# EAGLE board rc13-mbed-main-board (EAGLE 6.5.0)
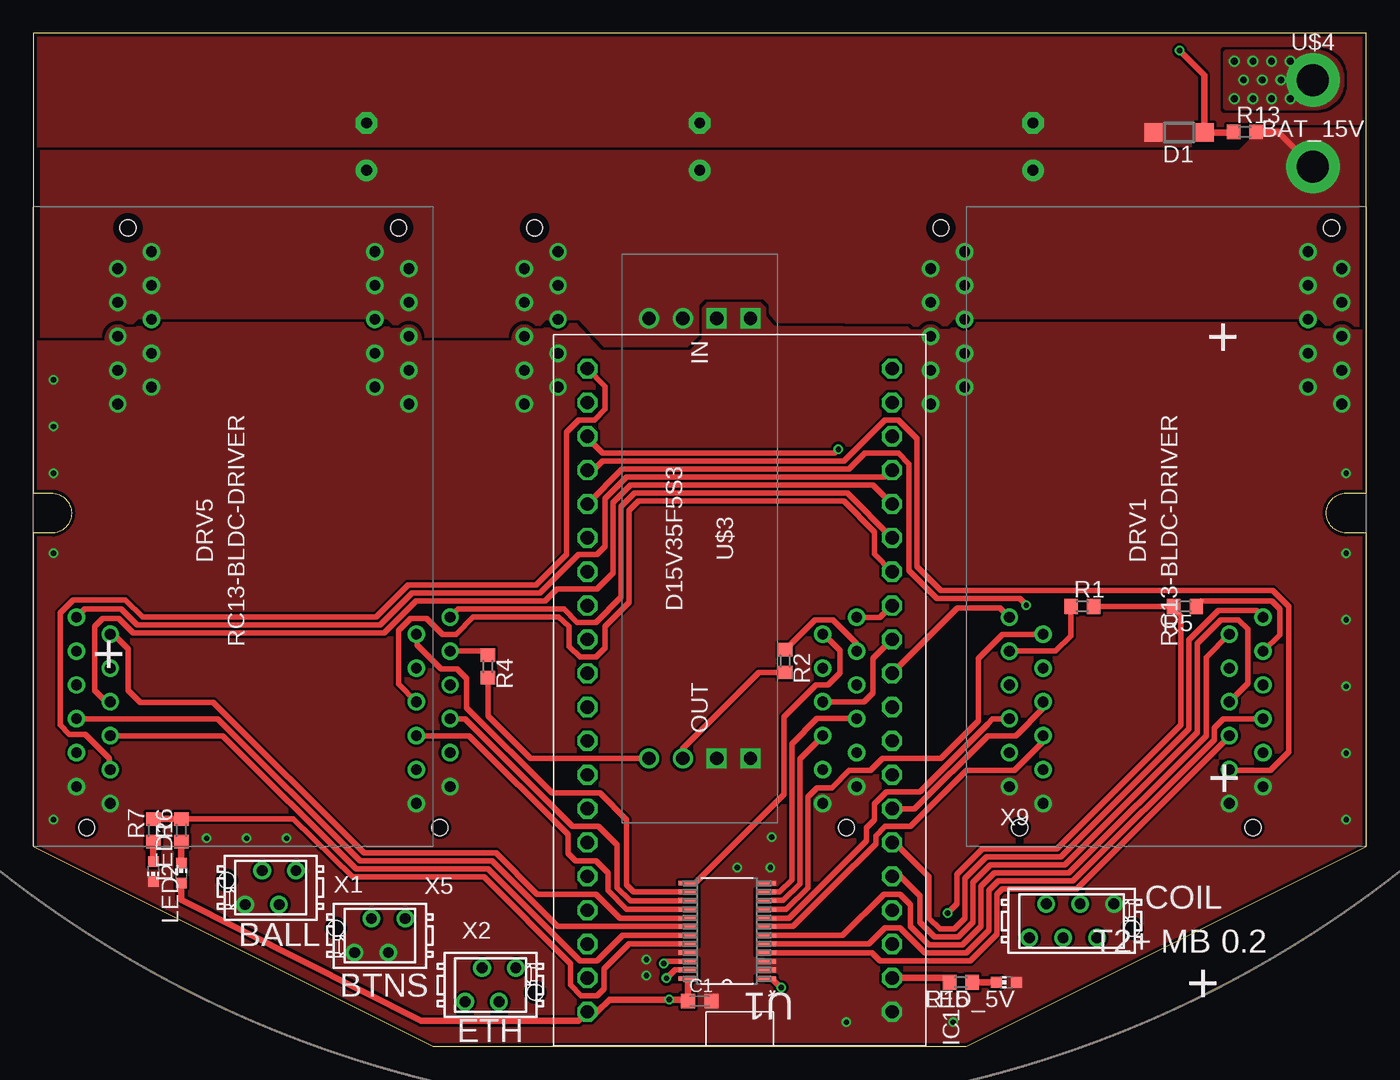
[diagram p0: board, top side]
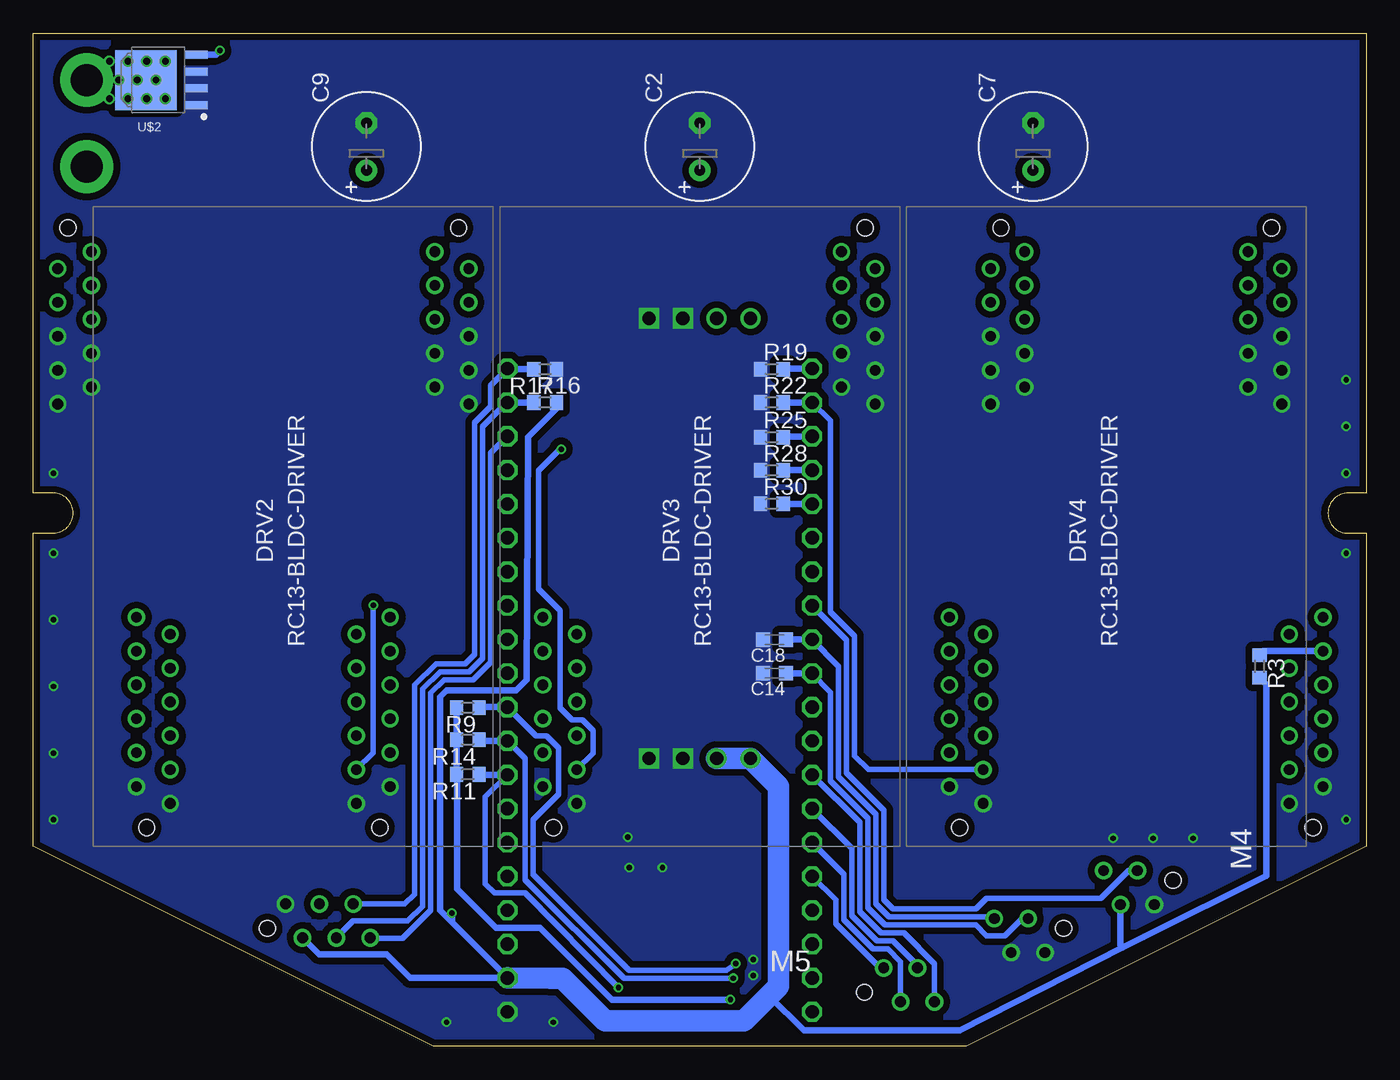
[diagram p1: board, bottom side, seen from below]

Size 100 x 76 mm. Coordinates in mm from the lower left corner, seen from the top.
Outline: 0,15 30,0 70,0 100,15 100,38.5 98.5,38.5 arc-180 98.5,41.5 100,41.5 100,76 0,76 0,41.5 1.5,41.5 arc-169 1.5,38.5 0,38.5 0,15
Copper layers (1*16): Top 0.035mm / dielectric 1.5mm / Bottom 0.035mm
Design rules "Fusion_eagle_rule_v1.1 *": minimum track width 6mil, minimum drill 12mil, track to track 0.2mm, track to pad 0.2mm, pad to pad 0.2mm, via to via 0.2mm, smd to smd 0mil, copper to edge 10mil, drill to drill 10mil, minimum pad ring 10mil, minimum via ring 6mil, stop-mask expansion 2mil, vias tented up to drill 100mil, thermal gap 10mil
Holes 1.2 mm at 82.45,8.85 37.65,4.05 22.7,8.85 14.5,12.45

## Footprints (pad centres in the part's own frame; a part is rotated, then mirrored left to right if it is on the bottom)
PWR_HOLE = drill 2.4 pad 4: P$1 0,0
C0603K = smd 1.05 x 1.08: 1 -0.875,0; 2 0.875,0
E3,5-8 = drill 0.813 pad 1.6: + -1.778,0 | drill 0.813 pad 1.6 octagon: - 1.778,0
SOD123 = smd 1.4 x 1.4: A 1.9,0; C -1.9,0
RC13-BLDC-DRIVER = drill 0.8 pad 1.3: LOGIC1 3.215,24.23; LOGIC2 4.485,26.77; LOGIC3 5.755,24.23; LOGIC4 7.025,26.77; LOGIC5 8.295,24.23; LOGIC6 9.565,26.77; LOGIC7 10.835,24.23; LOGIC8 12.105,26.77; LOGIC9 13.375,24.23; LOGIC10 14.645,26.77; LOGIC11 15.915,24.23; LOGIC12 17.185,26.77; PWR1 44.615,4.37; PWR2 43.345,1.83; PWR3 42.075,4.37; PWR4 40.805,1.83; PWR5 39.535,4.37; PWR6 38.265,1.83; PWR7 36.995,4.37; PWR8 35.725,1.83; PWR9 34.455,4.37; PWR10 33.185,1.83 | hole 1.2: 1.4,26; 46.4,2.6
DIL40_0.9 = drill 1 pad 1.397 octagon: 1 -22.86,-11.43; 2 -20.32,-11.43; 3 -17.78,-11.43; 4 -15.24,-11.43; 5 -12.7,-11.43; 6 -10.16,-11.43; 7 -7.62,-11.43; 8 -5.08,-11.43; 9 -2.54,-11.43; 10 0,-11.43; 11 2.54,-11.43; 12 5.08,-11.43; 13 7.62,-11.43; 14 10.16,-11.43; 15 12.7,-11.43; 16 15.24,-11.43; 17 17.78,-11.43; 18 20.32,-11.43; 19 22.86,-11.43; 20 25.4,-11.43; 21 25.4,11.43; 22 22.86,11.43; 23 20.32,11.43; 24 17.78,11.43; 25 15.24,11.43; 26 12.7,11.43; 27 10.16,11.43; 28 7.62,11.43; 29 5.08,11.43; 30 2.54,11.43; 31 0,11.43; 32 -2.54,11.43; 33 -5.08,11.43; 34 -7.62,11.43; 35 -10.16,11.43; 36 -12.7,11.43; 37 -15.24,11.43; 38 -17.78,11.43; 39 -20.32,11.43; 40 -22.86,11.43
CHIP-LED0603 = smd 0.8 x 0.8: A 0,-0.75; C 0,0.75
R0603 = smd 1 x 1.1: 1 -0.85,0; 2 0.85,0
SOP65P640X110-24N = smd 1.473 x 0.356: 1 -2.921,3.581; 2 -2.921,2.921; 3 -2.921,2.286; 4 -2.921,1.626; 5 -2.921,0.965; 6 -2.921,0.33; 7 -2.921,-0.33; 8 -2.921,-0.965; 9 -2.921,-1.626; 10 -2.921,-2.286; 11 -2.921,-2.921; 12 -2.921,-3.581; 13 2.921,-3.581; 14 2.921,-2.921; 15 2.921,-2.286; 16 2.921,-1.626; 17 2.921,-0.965; 18 2.921,-0.33; 19 2.921,0.33; 20 2.921,0.965; 21 2.921,1.626; 22 2.921,2.286; 23 2.921,2.921; 24 2.921,3.581
TO127P600X120-5N = smd 1.65 x 0.6: 1 -2.65,1.905; 2 -2.65,0.635; 3 -2.65,-0.635; 4 -2.65,-1.905 | smd 4.6 x 4.5: 5 1.15,0
D15V35F5S3 = drill 1: EN -16.51,-3.81; P$5 -16.51,-1.27; P$7 16.51,-1.27; P$8 16.51,-3.81 | drill 1 square: P$1 -16.51,3.81; P$2 -16.51,1.27; P$3 16.51,3.81; P$4 16.51,1.27
MICROMATCH-4 = drill 0.813: 1 1.905,1.27; 2 0.635,-1.27; 3 -0.635,1.27; 4 -1.905,-1.27
MICROMATCH-6 = drill 0.813: 1 3.175,1.27; 2 1.905,-1.27; 3 0.635,1.27; 4 -0.635,-1.27; 5 -1.905,1.27; 6 -3.175,-1.27

## Placement (x,y rotation side)
BAT_15V  M01_PWR  [PWR_HOLE]  96,66 0 top
C1  100nF  [C0603K]  50,3.4 0 top
C2  470uF  [E3,5-8]  50,67.5 90 bottom
C7  470uF  [E3,5-8]  25,67.5 90 bottom
C9  470uF  [E3,5-8]  75,67.5 90 bottom
C14  100nF  [C0603K]  44.4,28 180 bottom
C18  100nF  [C0603K]  44.4,30.5 180 bottom
D1  12V  [SOD123]  85.95,68.56 180 top
DRV1  RC13-BLDC-DRIVER  [RC13-BLDC-DRIVER]  100,15 90 top
DRV2  RC13-BLDC-DRIVER  [RC13-BLDC-DRIVER]  65.5,15 90 bottom
DRV3  RC13-BLDC-DRIVER  [RC13-BLDC-DRIVER]  35,15 90 bottom
DRV4  RC13-BLDC-DRIVER  [RC13-BLDC-DRIVER]  4.5,15 90 bottom
DRV5  RC13-BLDC-DRIVER  [RC13-BLDC-DRIVER]  30,15 90 top
IC1  MBED_MICROCONTROLLER  [DIL40_0.9]  53,25.44 90 top
LED1  [CHIP-LED0603]  11.1,13 0 top
LED2  [CHIP-LED0603]  9,13.1 180 top
LED_5V  [CHIP-LED0603]  73,4.8 90 top
R1  10k  [R0603]  78.7,33 0 top
R2  10k  [R0603]  56.4,28.9 270 top
R3  10k  [R0603]  8,28.5 270 bottom
R4  10k  [R0603]  34.1,28.5 270 top
R5  10k  [R0603]  86.4,33 180 top
R6  2K2  [R0603]  11.1,16.2 90 top
R7  2K2  [R0603]  9,16.2 90 top
R9  2K2  [R0603]  67.4,25.4 180 bottom
R11  2K2  [R0603]  67.4,20.4 180 bottom
R13  100k  [R0603]  90.89,68.59 0 top
R14  2K2  [R0603]  67.4,23 180 bottom
R15  2K2  [R0603]  69.6,4.8 180 top
R16  10k  [R0603]  61.6,48.3 0 bottom
R17  10k  [R0603]  61.6,50.8 180 bottom
R19  10k  [R0603]  44.6,50.8 0 bottom
R22  10k  [R0603]  44.6,48.3 0 bottom
R25  10k  [R0603]  44.6,45.7 0 bottom
R28  10k  [R0603]  44.6,43.2 0 bottom
R30  10k  [R0603]  44.6,40.7 0 bottom
U1  PCA9555PW,118  [SOP65P640X110-24N]  52.05,8.65 180 top
U$2  MOSFET-N  [TO127P600X120-5N]  90.4,72.5 180 bottom
U$3  D15V35F5S3  [D15V35F5S3]  50,38.1 270 top
U$4  M01_PWR  [PWR_HOLE]  96,72.5 0 top
X1  BALL_SENS  [MICROMATCH-4]  17.8,11.9 180 top
X2  ETH  [MICROMATCH-4]  34.3,4.6 0 top
X5  BTNS  [MICROMATCH-4]  26,8.3 180 top
X9  COIL  [MICROMATCH-6]  77.9,9.4 0 top

## Library data of the parts
BAT_15V U$4 = tellis2
C1 C2 C7 C9 C14 C18 R1-R7 R9 R11 R13-R17 R19 R22 R25 R28 R30 = rcl
D1 = diode
DRV1-DRV5 = rc13-bldc-driver
IC1 = mbed-microcontroller
LED1 LED2 LED_5V = led
U1 = PCA9555; MPN: PCA9555PW,118; OC_FARNELL: 2101299; OC_NEWARK: 70R6680; PACKAGE: 24TSSOP; SUPPLIER: NXP
U$2 = nxp_sot669
U$3 = D15V35F5S3
X1 X2 X5 = con-amp-micromatch; MPN: 7-215464-4; OC_FARNELL: 3784629; OC_NEWARK: 19R8124
X9 = con-amp-micromatch; MPN: 7-215464-6; OC_FARNELL: 3784630; OC_NEWARK: 19R8125

## Nets
+3V3: C1.1 IC1.40 LED1.A R9.2 R11.2 R14.2 U1.24
+5V: IC1.2 R1.2 R2.2 R3.2 R4.2 R5.2 R15.2 R16.2 U$3.P$7 U$3.P$8 X1.3 X9.2
+15V: BAT_15V.P$1 C2.+ C7.+ C9.+ DRV1.PWR1 DRV1.PWR2 DRV1.PWR3 DRV1.PWR4 DRV1.PWR5 DRV2.PWR1 DRV2.PWR2 DRV2.PWR3 DRV2.PWR4 DRV2.PWR5 DRV3.PWR1 DRV3.PWR2 DRV3.PWR3 DRV3.PWR4 DRV3.PWR5 DRV4.PWR1 DRV4.PWR2 DRV4.PWR3 DRV4.PWR4 DRV4.PWR5 DRV5.PWR1 DRV5.PWR2 DRV5.PWR3 DRV5.PWR4 DRV5.PWR5 R13.2 U$3.EN U$3.P$5
BALL: IC1.28 X1.2
BAT_GND: U$2.5 U$4.P$1
BRAKE1: DRV1.LOGIC6 U1.8
BRAKE2: DRV2.LOGIC6 U1.5
BRAKE3: DRV3.LOGIC6 U1.11
BRAKE4: DRV4.LOGIC6 U1.15
BRAKE5: DRV5.LOGIC6 U1.18
BTN1: C14.1 IC1.30 X5.2
BTN2: C18.1 IC1.29 X5.4
CHARGE: IC1.20 R17.2 X9.5
COAST1: DRV1.LOGIC11 U1.9
COAST2: DRV2.LOGIC11 U1.6
COAST3: DRV3.LOGIC11 U1.13
COAST4: DRV4.LOGIC11 U1.14
COAST5: DRV5.LOGIC11 U1.17
DIR1: DRV1.LOGIC5 U1.7
DIR2: DRV2.LOGIC5 U1.4
DIR3: DRV3.LOGIC5 U1.10
DIR4: DRV4.LOGIC5 U1.16
DIR5: DRV5.LOGIC5 U1.19
DIRO1: DRV1.LOGIC12 IC1.11
DIRO2: DRV2.LOGIC12 IC1.6
DIRO3: DRV3.LOGIC12 IC1.13
DIRO4: DRV4.LOGIC12 IC1.15
DIRO5: DRV5.LOGIC12 IC1.17
DONE: IC1.18 X9.6
GND: C1.2 C2.- C7.- C9.- C14.2 C18.2 D1.A DRV1.LOGIC1 DRV1.LOGIC2 DRV1.PWR6 DRV1.PWR7 DRV1.PWR8 DRV1.PWR9 DRV1.PWR10 DRV2.LOGIC1 DRV2.LOGIC2 DRV2.PWR6 DRV2.PWR7 DRV2.PWR8 DRV2.PWR9 DRV2.PWR10 DRV3.LOGIC1 DRV3.LOGIC2 DRV3.PWR6 DRV3.PWR7 DRV3.PWR8 DRV3.PWR9 DRV3.PWR10 DRV4.LOGIC1 DRV4.LOGIC2 DRV4.PWR6 DRV4.PWR7 DRV4.PWR8 DRV4.PWR9 DRV4.PWR10 DRV5.LOGIC1 DRV5.LOGIC2 DRV5.PWR6 DRV5.PWR7 DRV5.PWR8 DRV5.PWR9 DRV5.PWR10 IC1.1 LED2.C LED_5V.A R17.1 R19.1 R22.1 R25.1 R28.1 R30.1 U1.2 U1.3 U1.12 U1.21 U$2.1 U$2.2 U$2.3 U$3.P$1 U$3.P$2 U$3.P$3 U$3.P$4 X1.1 X5.1 X5.3 X9.1
INT: IC1.8 R11.1 U1.1
KICK: IC1.19 R16.1 X9.4
LED1: R6.2 R7.2 U1.20
N$2: DRV1.LOGIC10 R1.1
N$3: DRV2.LOGIC10 R5.1
N$4: DRV4.LOGIC10 R4.1
N$5: DRV5.LOGIC10 R3.1
N$6: DRV3.LOGIC10 R2.1
N$7: LED1.C R6.1
N$8: LED2.A R7.1
N$9: LED_5V.C R15.1
N$20: D1.C R13.1 U$2.4
PWM1: DRV1.LOGIC3 IC1.25 R30.2
PWM2: DRV2.LOGIC3 IC1.24 R28.2
PWM3: DRV3.LOGIC3 IC1.23 R25.2
PWM4: DRV4.LOGIC3 IC1.22 R22.2
PWM5: DRV5.LOGIC3 IC1.21 R19.2
RD+: IC1.35 X2.2
RD-: IC1.36 X2.1
SCL: IC1.10 R9.1 U1.22
SDA: IC1.9 R14.1 U1.23
TACHO1: DRV1.LOGIC7 IC1.7
TACHO2: DRV2.LOGIC7 IC1.5
TACHO3: DRV3.LOGIC7 IC1.12
TACHO4: DRV4.LOGIC7 IC1.14
TACHO5: DRV5.LOGIC7 IC1.16
TD+: IC1.33 X2.4
TD-: IC1.34 X2.3

## Tracks (layer width: path | path; a pad name or v marks a point on that pad's centre or on a via)
+3V3  (via drill 0.4)
  Top 0.4: C1.1 | 11.1,11.7 LED1.A
  Top 0.5: C1.1 U1.24 | C1.1 49.02,3.5 v47.7,3.5 43.22,3.5 42.3,2.58 IC1.40 41.54,2.54 40.9,1.9 29.1,1.9 11.1,11 11.1,11.7
  Bottom 0.5: R9.2 R14.2 R11.2 68.2,20.35 68.2,11.8 65.3,8.9 62,8.9 56.6,3.5 v47.7,3.5
+5V  (via drill 0.4)
  Top 0.4: R1.2 R5.2 85.55,32.85 86.1,32.3 86.1,24.1 76.8,14.8 71.2,14.8 69.3,12.9 69.3,10.7 v68.6,10 | R2.2 54.45,28.05 48.7,22.3 48.7,21.62 U$3.P$7 | R4.2 34.1,24.8 37.3,21.6 U$3.P$8
  Top 0.5: R15.2 68.23,5.12 IC1.2
  Bottom 0.5: 61.2,5.2 IC1.2 | R16.2 60.75,47.85 62.9,45.7 63,27.5 63.8,26.7 69,26.7 69.5,26.2 69.5,10.2 68.6,9.3 | IC1.2 68.6,9.3 | 18.25,7.41 16.7,8.2 7.5,12.8 7.5,27.15 R3.2 | 18.25,7.41 30.5,1.2 42.2,1.2 44.8,3.8 | v68.6,10 68.6,9.3 | X9.2 78.58,6.9 73.5,6.9 71.72,5.12 IC1.2 | X1.3 18.43,7.59 18.25,7.41
  Bottom 1.6: U$3.P$7 U$3.P$8 44.09,19.49 44.09,4.51 44.8,3.8 46.7,1.9 57.1,1.9 60.3,5.1 61.18,5.1 IC1.2
+15V
  Top 0.5: R13.2 93.41,68.59 BAT_15V.P$1
  pour Top (isolate 0.5, no thermals): 0,53.4 6.4,53.4 7.8,54.8 26.6,54.8 28,53.4 37.1,53.4 38.4,54.7 41,54.7 42.9,52.7 49,52.7 49.7,53.4 49.7,55.7 50.3,56.3 54.8,56.3 55.4,55.7 55.4,55.1 55.9,54.5 65.9,54.4 66.9,53.4 67.7,53.4 69,54.8 96.5,54.8 97.9,53.4 100,53.4 100,68.7 92.2,68.7 90.5,67 0,67
BALL
  Bottom 0.4: IC1.28 39,30.49 39,20.5 36.2,17.7 36.2,11 35.5,10.3 29.3,10.3 28.5,11.1 19.9,11.1 17.8,13.2 17.2,13.2 X1.2
BAT_GND  (via drill 0.5)
  Bottom 0.4: v92.2,72.5 U$2.5
  other vias: 90.1,73.9 90.8,72.5 90.1,71.1 91.5,73.9 91.5,71.1 92.9,73.9 93.6,72.5 92.9,71.1 94.3,73.9 94.3,71.1
  pour Top (isolate 0.5, no thermals): 89.5,74.55 89.5,70.45 96.15,70.45 arc90 98.15,72.45 98.15,72.55 arc90 96.15,74.55
BRAKE1
  Top 0.4: U1.8 54.99,9.6 56.7,9.6 59.4,12.3 | 71.6,24.2 71.97,24.57 DRV1.LOGIC6
  Top 0.406: 59.4,12.3 62.5,15.4 62.5,16.4 63.1,17 63.1,18.2 64,19.1 66.5,19.1 71.6,24.2
BRAKE2
  Top 0.4: U1.5 62.69,7.68 63.9,8.9 65,8.9 66.9,7 70,7 71.7,8.7 71.7,11.7 72.4,12.4 78,12.4 88.6,23 88.6,23.9 89.27,24.57 DRV2.LOGIC6
BRAKE3
  Top 0.4: U1.11 55.97,11.57 56.9,12.5 56.9,22.7 58.8,24.6 61.73,24.6 DRV3.LOGIC6
BRAKE4
  Top 0.4: 49.09,10.9 U1.15
  Top 0.406: 49.09,10.9 44.8,10.9 43.8,11.9 43.8,15.1 42.4,16.5 40.47,16.5 32.4,24.57 DRV4.LOGIC6
BRAKE5
  Top 0.4: 39.32,8.98 34.4,13.9 24.5,13.9 13.84,24.57 DRV5.LOGIC6
  Top 0.406: U1.18 39.32,8.98
BTN1
  Bottom 0.4: IC1.30 40.2,26.54 40.2,19.9 37.4,17.1 37.4,10.4 36.1,9.1 29.3,9.1 28.5,8.3 27.1,8.3 25.83,9.57 X5.2
  Bottom 0.5: IC1.30 43.1,27.98 C14.1
BTN2
  Bottom 0.4: IC1.29 39.6,28.48 39.6,20.2 36.8,17.4 36.8,10.7 35.8,9.7 28.04,9.7 X5.4
  Bottom 0.5: IC1.29 43.41,30.52 C18.1
CHARGE
  Bottom 0.4: IC1.20 65.7,49.57 65.7,48 66.9,46.8 66.9,29.4 67.6,28.7 69.8,28.7 71.4,27.1 71.4,11.4 72.13,10.67 X9.5
  Bottom 0.5: IC1.20 64.06,50.8 R17.2
COAST1
  Top 0.4: U1.9 56.48,10.28 58.1,11.9 58.1,18.7 58.8,19.4 59.9,19.4 61.2,20.7 62.8,20.7 63.7,21.6 | 70.9,24.4 70.9,29.1 72.7,30.9 75.75,30.9 DRV1.LOGIC11
  Top 0.406: 63.7,21.6 68.1,21.6 70.9,24.4
COAST2
  Top 0.4: U1.6 60.72,8.32 63.8,11.4 65,11.4 65.8,10.6 65.8,9 67.2,7.6 69.7,7.6 71.1,9 71.1,12 72.1,13 77.7,13 88,23.3 88,29.18 DRV2.LOGIC11
COAST3
  Top 0.4: U1.13 49.63,12.23 56.3,18.9 56.3,24.7 58.7,27.1 59.6,27.1 60.5,28 60.5,29.7 59.28,30.91 DRV3.LOGIC11
COAST4
  Top 0.4: 32.5,25.4 32.5,27.6 31.8,28.3 30.6,28.3 28.8,30.1 28.8,30.84 DRV4.LOGIC11
  Top 0.406: U1.14 45.03,11.57 44.5,12.1 44.5,17 42.5,19 38.9,19 32.5,25.4
COAST5
  Top 0.4: 37.8,11.4 34.7,14.5 24.8,14.5 13.5,25.8 8,25.8 7.1,26.7 7.1,29.8 5.99,30.91 DRV5.LOGIC11
  Top 0.406: 37.8,11.4 42.2,11.4 44,9.6 49.11,9.6 U1.17
DIR1
  Top 0.4: U1.7 54.99,9 57,9 60,12 | 65.8,16.5 70,20.7 73.6,20.7 75.77,22.87 DRV1.LOGIC5
  Top 0.406: 60,12 63.2,15.2 63.2,15.8 63.9,16.5 65.8,16.5
DIR2
  Top 0.4: U1.4 54.99,7 62.9,7 63.5,6.4 70.3,6.4 72.3,8.4 72.3,11.4 72.7,11.8 78.3,11.8 89.73,23.23 DRV2.LOGIC5
DIR3
  Top 0.4: U1.10 56.24,10.94 57.5,12.2 57.5,21.57 DRV3.LOGIC5
DIR4
  Top 0.406: U1.16 44.52,10.28 43.1,11.7 43.1,13 42.2,13.9 40.66,13.9 40.1,14.46 40.1,15.9 32.7,23.3 DRV4.LOGIC5
DIR5
  Top 0.4: 46.22,8.32 U1.19 | DRV5.LOGIC5 14.21,23.3 24.2,13.3 34.1,13.3 41,6.4
  Top 0.406: 46.22,8.32 44.22,8.32 42.3,6.4 41,6.4
DIRO1
  Top 0.4: IC1.11 69.32,32.9 72.5,32.9 73.22,32.19 DRV1.LOGIC12
DIRO2
  Top 0.4: IC1.6 64.62,15.28 67.2,12.7 67.2,9.6 68,8.8 69.1,8.8 69.9,9.6 69.9,12.6 71.5,14.2 77.1,14.2 86.7,23.8 86.7,30.5 88.9,32.7 91.75,32.7 DRV2.LOGIC12
DIRO3
  Top 0.4: DRV3.LOGIC12 63.52,32.19 IC1.13
DIRO4
  Top 0.4: IC1.15 61.07,41.5 45.1,41.5 44.1,40.5 44.1,33.7 42.2,31.8 40.8,31.8 39.8,32.8 31.89,32.8 DRV4.LOGIC12
DIRO5
  Top 0.4: IC1.17 63.91,42.7 44.5,42.7 42.9,41.1 42.9,37.5 42.3,36.9 40.9,36.9 38,34 28.4,34 26,31.6 7.8,31.6 6.6,32.8 3.85,32.8 DRV5.LOGIC12
DONE
  Bottom 0.4: IC1.18 65.7,44.5 65.7,28.8 67,27.5 69.2,27.5 70.2,26.5 70.2,10.2 72.3,8.1 74.69,8.1 X9.6
GND  (via drill 0.4)
  other vias: 1.5,50 1.5,43 1.5,37 98.5,37 98.5,43 98.5,32 98.5,27 98.5,22 98.5,17 13,15.6 16,15.6 19,15.6 1.5,46.5 1.5,17 52.8,13.4 55.3,13.4 55.4,15.7 61,1.8 69,1.8 46,5.3 46,6.5
  pour Top (isolate 0.2, rank 2, no thermals): 0,76 0,15 30,0 70,0 100,15 100,76
  pour Bottom (isolate 0.5, no thermals): 0,76 100,76 100,15 70,0 30,0 0,15
INT  (via drill 0.4)
  Top 0.4: U1.1 55.43,5.07 v56.1,4.4
  Bottom 0.4: v56.1,4.4 63.1,11.5 65.4,11.5 66.1,12.2 66.1,18.69 IC1.8
  Bottom 0.5: R11.1 66.51,20.36 IC1.8
KICK
  Bottom 0.4: X9.4 76,9.4 71.9,9.4 70.8,10.5 70.8,26.8 69.5,28.1 67.3,28.1 66.3,29.1 66.3,46.5 64.5,48.3 IC1.19
  Bottom 0.5: IC1.19 R16.1
LED1
  Top 0.4: U1.20 46.88,7.68 | R6.2 19.5,17.05 23.95,12.7 33.8,12.7 40.3,6.2
  Top 0.406: 46.88,7.68 44.69,7.68 42.8,5.8 42.8,4.3 42.3,3.8 41.1,3.8 40.3,4.6 40.3,6.2
  Top 0.5: R6.2 R7.2
N$2
  Top 0.4: DRV1.LOGIC10 76.69,29.64 77.85,30.8 R1.1
N$3
  Top 0.4: DRV2.LOGIC10 93.5,30.88 93.5,32.8 92.9,33.4 87.6,33.4 87.2,33 R5.1
N$4
  Top 0.4: R4.1 33.8,29.64 DRV4.LOGIC10
N$5
  Bottom 0.5: DRV5.LOGIC10 7.71,29.64 R3.1
N$6
  Top 0.4: R2.1 58.65,32 60,32 61.77,30.23 DRV3.LOGIC10
N$7
  Top 0.5: LED1.C R6.1
N$8
  Top 0.5: R7.1 LED2.A
N$9
  Top 0.5: LED_5V.C R15.1
N$20  (via drill 0.4)
  Top 0.5: R13.1 89.77,68.56 D1.C 87.85,72.85 v86,74.7
  Bottom 0.5: U$2.4 86.3,74.41 v86,74.7
PWM1  (via drill 0.4)
  Top 0.4: IC1.25 44.16,43.3 61.2,43.3 62.4,44.5 64.9,44.5 65.7,43.7 65.7,35.7 67.8,33.6 74,33.6 v74.5,33.1
  Bottom 0.4: DRV1.LOGIC3 74.5,22.02 v74.5,33.1
  Bottom 0.5: R30.2 43.83,40.68 IC1.25
PWM2
  Top 0.4: IC1.24 42.02,43.22 42.7,43.9 60.8,43.9 63.9,47 64.9,47 66.3,45.6 66.3,36 68.1,34.2 93,34.2 94.2,33 94.2,22.1 92.8,20.7 89.78,20.7 DRV2.LOGIC3
  Bottom 0.5: R28.2 43.73,43.22 IC1.24
PWM3  (via drill 0.4)
  Top 0.4: IC1.23 41.6,45.6 42.7,44.5 60.1,44.5 v60.4,44.8
  Bottom 0.4: v60.4,44.8 60.5,44.8 62.1,43.2 62.1,34.3 60.5,32.7 60.5,25.4 59.6,24.5 58.8,24.5 58,23.7 58,21.98 DRV3.LOGIC3
  Bottom 0.5: R25.2 43.59,45.76 IC1.23
PWM4
  Bottom 0.4: DRV4.LOGIC3 37.35,20.75 38.4,21.8 38.4,30.8 40.2,32.6 40.2,46.93 IC1.22
  Bottom 0.5: R22.2 IC1.22
PWM5
  Top 0.4: IC1.21 42.9,49.51 42.9,47.8 42.1,47 40.9,47 40,46.1 40,36.9 37.7,34.6 28.1,34.6 25.7,32.2 8.2,32.2 6.9,33.5 3,33.5 2,32.5 2,24.1 2.7,23.4 3.9,23.4 5.7,21.6 5.7,20.82 DRV5.LOGIC3
  Bottom 0.5: R19.2 43.31,50.84 IC1.21
RD+
  Bottom 0.4: X2.2 34.94,6.33 35.9,7.3 37,7.3 39.2,9.5 39.2,12.91 IC1.35
RD-
  Bottom 0.4: X2.1 36.57,5.97 39.8,9.2 39.8,10.97 IC1.36
SCL  (via drill 0.4)
  Top 0.4: U1.22 47.44,6.36 v47.3,6.2
  Bottom 0.4: 64.24,25.44 IC1.10 62.3,23.3 61.5,23.3 60.6,22.4 60.6,18.9 62.5,17 62.5,12.9 55.3,5.7 48,5.7 v47.3,6.2
  Bottom 0.5: R9.1 66.51,25.44 IC1.10
SDA  (via drill 0.4)
  Top 0.4: U1.23 48.13,5.73 v47.5,5.1
  Bottom 0.4: v47.5,5.1 55.7,5.1 63.1,12.5 63.1,21.6 64.4,22.9 IC1.9
  Bottom 0.5: R14.1 66.45,22.9 IC1.9
TACHO1
  Top 0.4: 66.12,17.82 71.6,23.3 73.7,23.3 75.77,25.37 DRV1.LOGIC7
  Top 0.406: 66.12,17.82 IC1.7
TACHO2
  Top 0.4: IC1.5 65.06,12.74 66.5,11.3 66.5,9.3 67.6,8.2 69.4,8.2 70.5,9.3 70.5,12.3 71.8,13.6 77.4,13.6 87.33,23.54 87.33,30.23 89.1,32 90.4,32 91.1,31.3 91.1,27.2 DRV2.LOGIC7
TACHO3
  Top 0.4: DRV3.LOGIC7 62.34,25.84 63,26.5 63,29.09 IC1.12
TACHO4
  Top 0.4: IC1.14 63.1,36.93 63.1,38.6 60.8,40.9 45.4,40.9 44.7,40.2 44.7,33.3 42.9,31.5 42.9,29.9 42.2,29.2 41,29.2 40.2,30 40.2,31.5 39.4,32.2 33,32.2 31.7,30.9 30.7,30.9 29.5,32.1 28.3,32.1 27.4,31.2 27.4,27.16 DRV4.LOGIC7
TACHO5
  Top 0.4: IC1.16 63.01,42.1 44.8,42.1 43.5,40.8 43.5,35.5 42.3,34.3 39.3,34.3 38.4,33.4 28.7,33.4 26.3,31 7.5,31 6.4,32.1 5.2,32.1 4.6,31.5 4.6,26.7 5.46,25.84 DRV5.LOGIC7
TD+
  Bottom 0.4: X2.4 32.4,6.2 34.7,8.5 36.4,8.5 38,10.1 38,16.8 IC1.33
TD-
  Bottom 0.4: X2.3 33.66,6.07 35.5,7.9 36.7,7.9 38.6,9.8 38.6,14.85 IC1.34

## Text on the board
tNames: + | + | + | COIL | BALL | T2+ MB 0.2 | BTNS | + | ETH
bNames: M4 | M5